# Altium PCB EC20LCC_PCB尺寸图.PcbDoc
Units mil, origin at the board's own origin, x right, y up, seen from the top; angles counter-clockwise.
Board outline 6000 x 4000 mil, 2 copper layers (Top Layer, Bottom Layer); 2 components, 57 nets, 17 pads, 0 vias.
Unrouted connection lines stored in the file: 1.
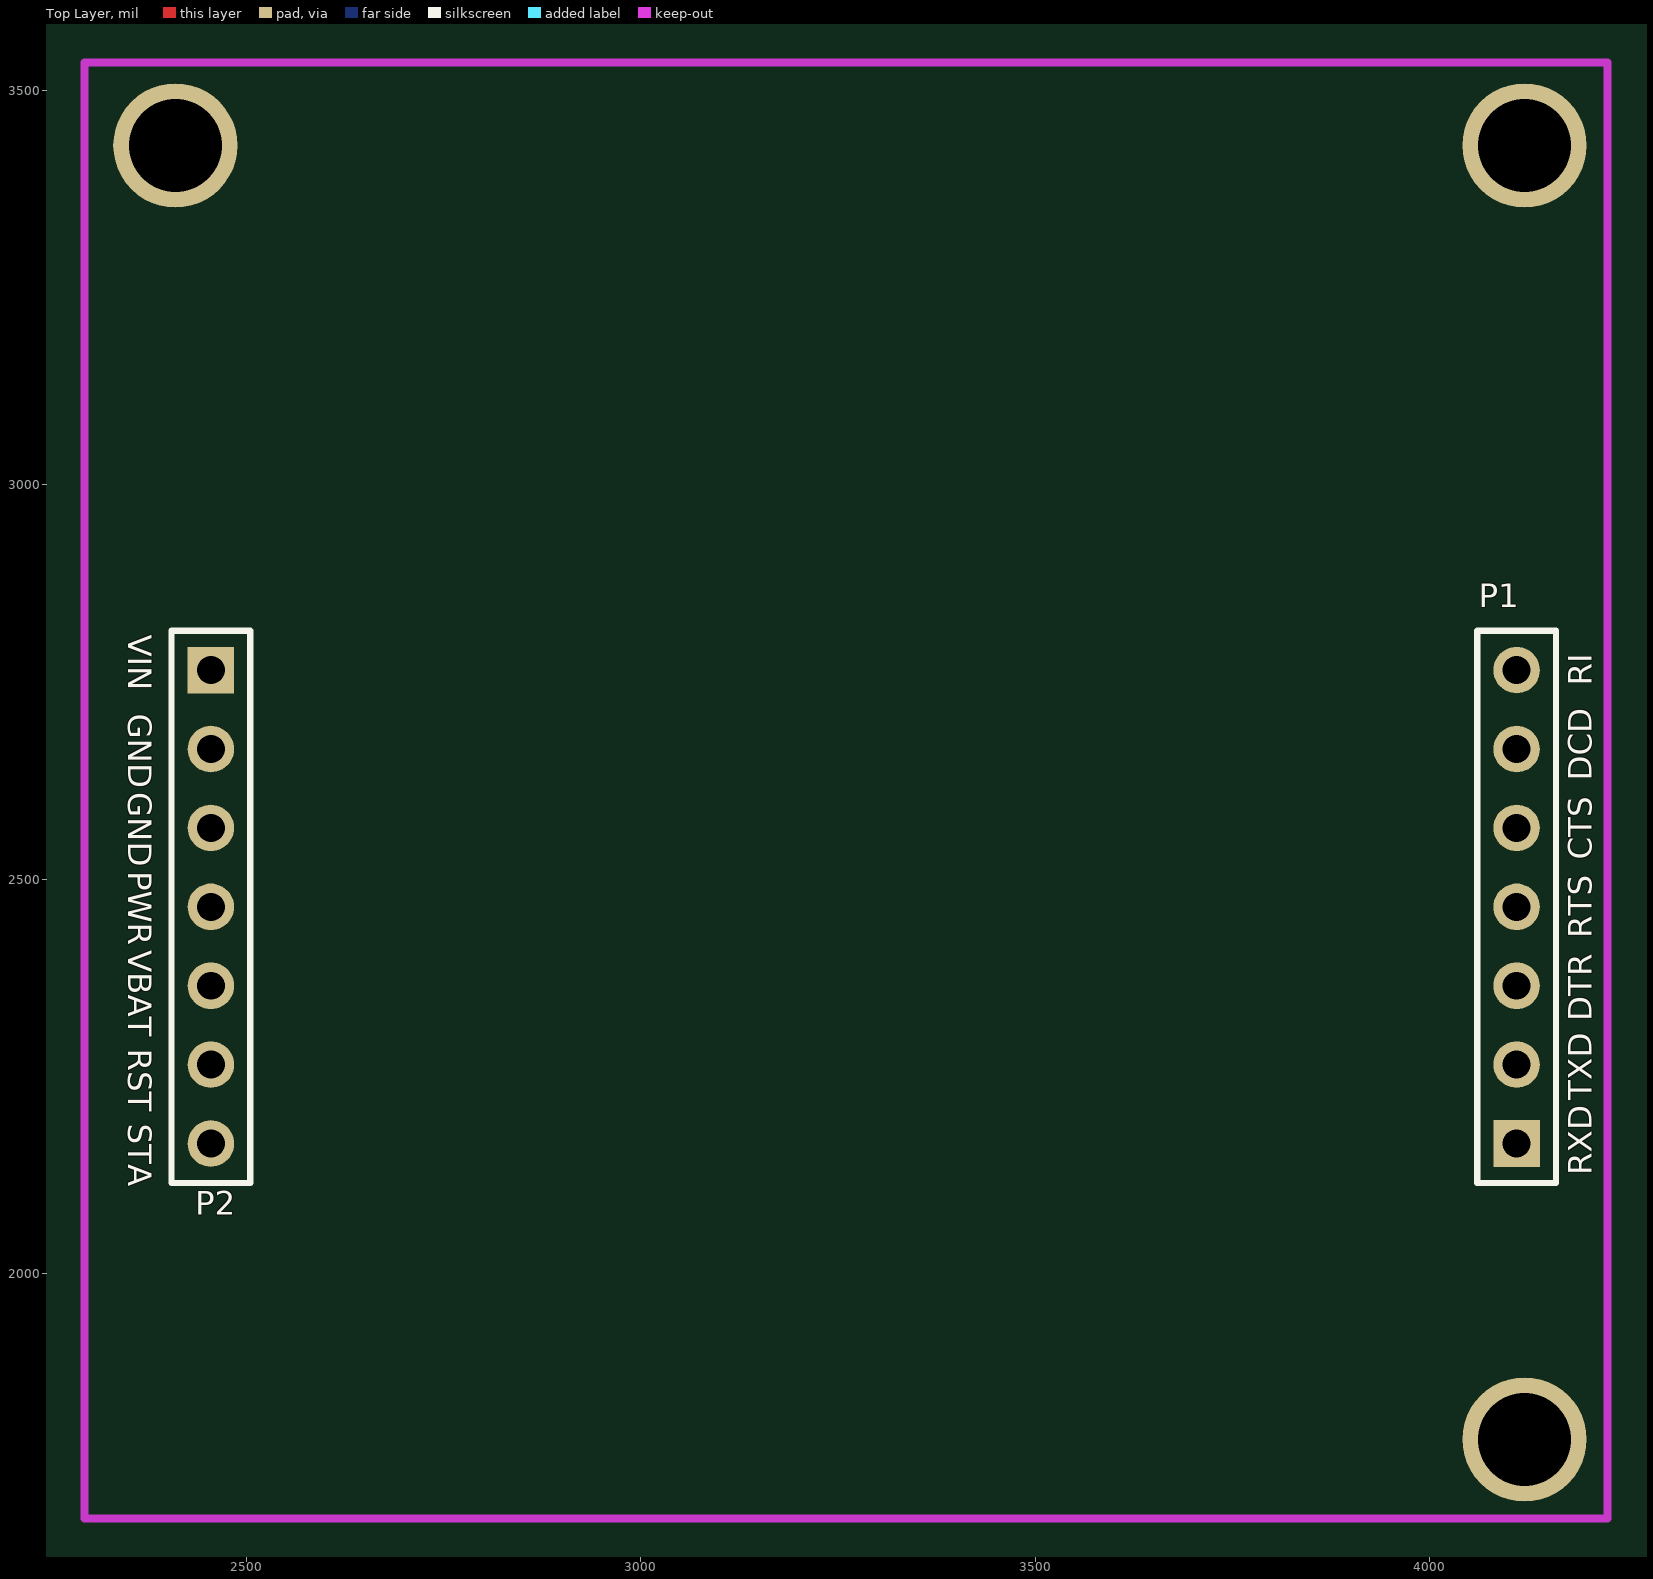
[diagram p0: Top Layer view]
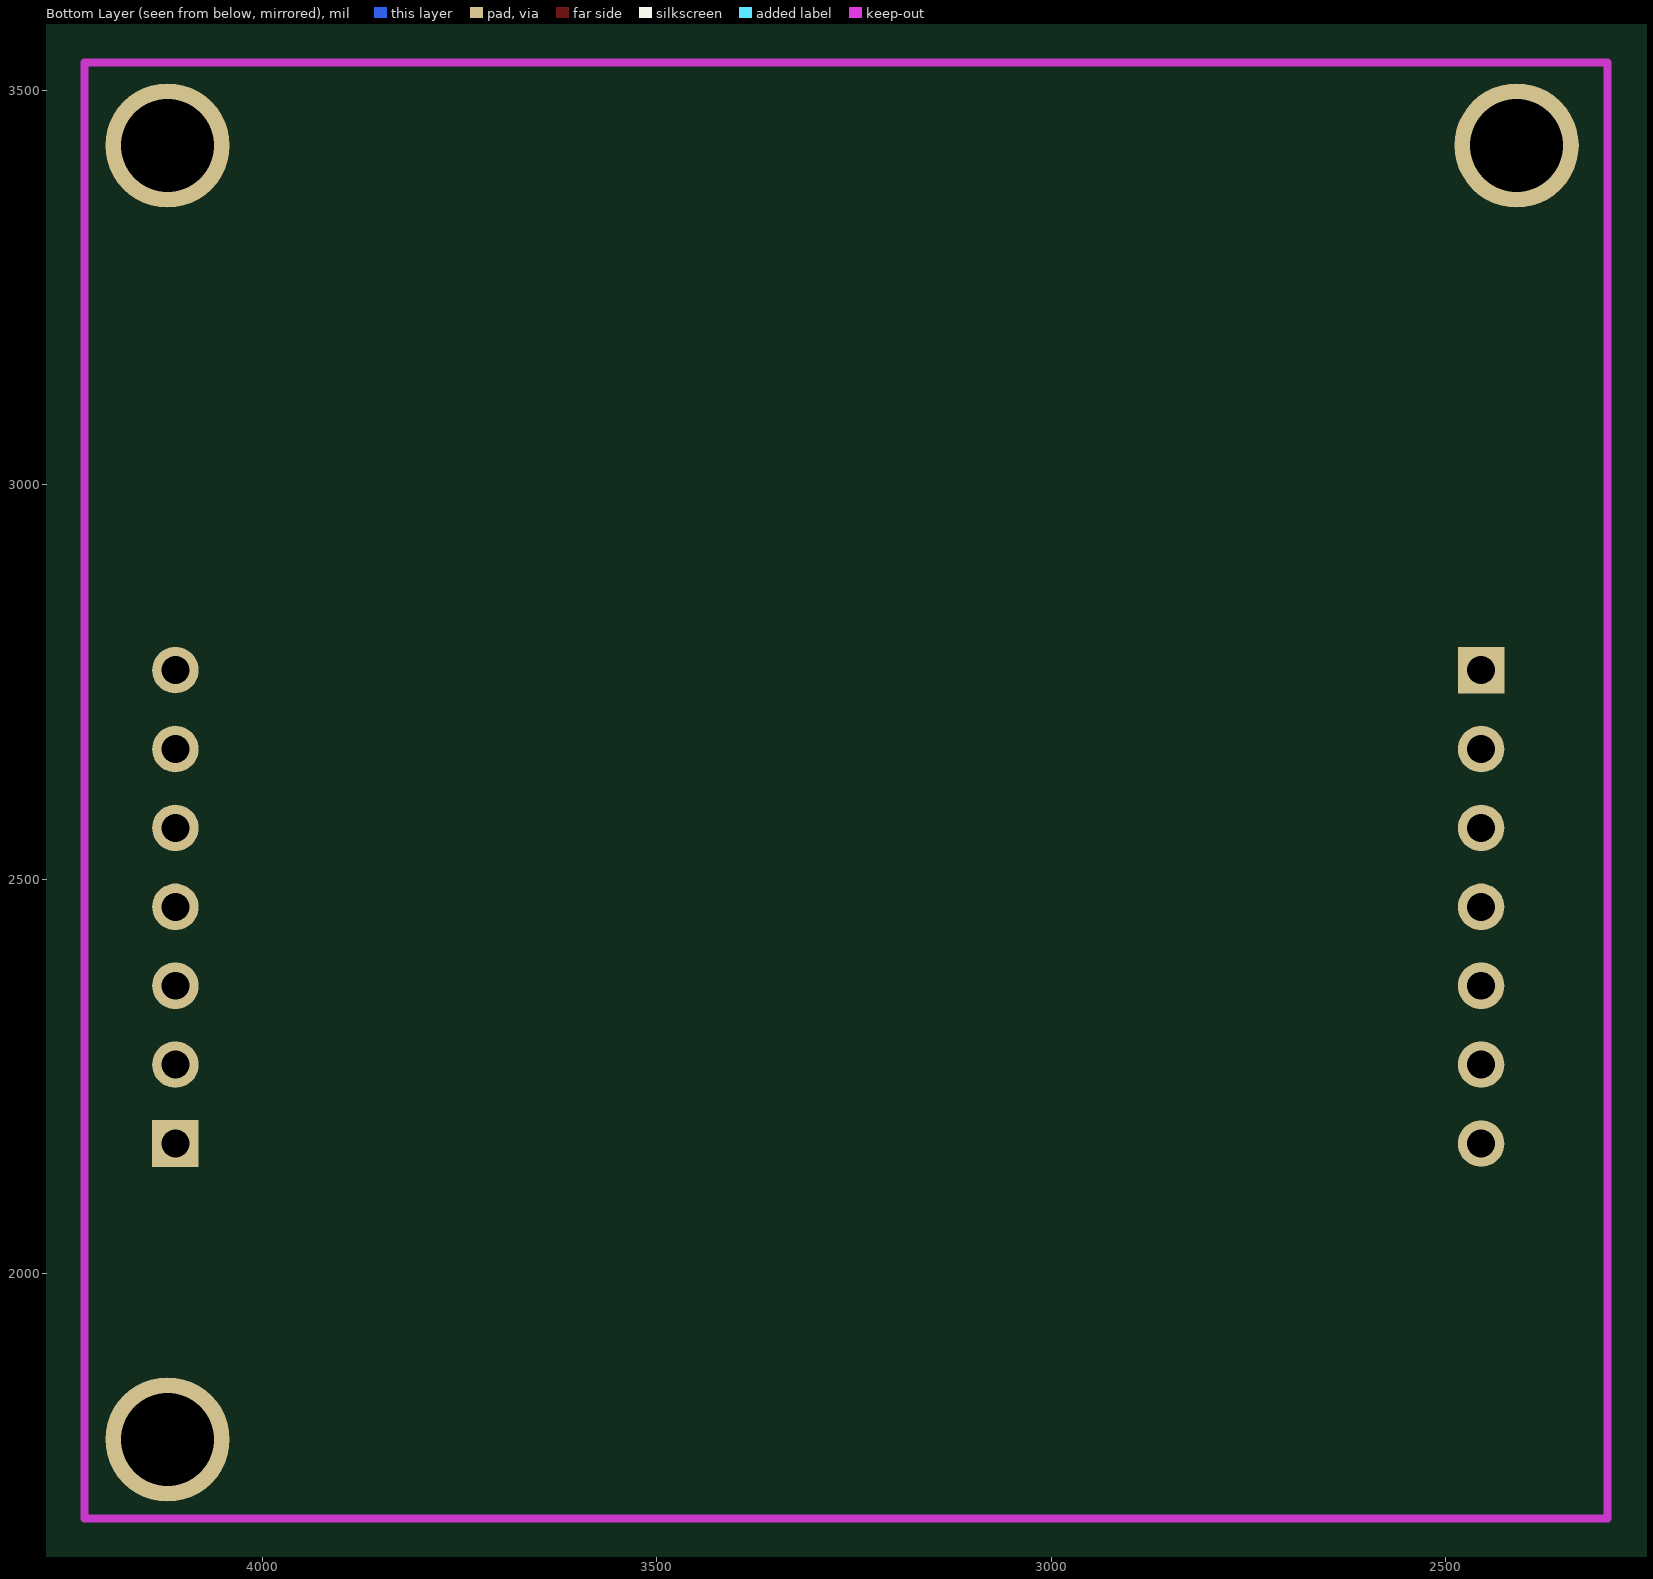
[diagram p1: Bottom Layer view, seen from below]

## Layer stack, top to bottom
Top Layer: signal copper 1.4
Dielectric: dielectric 12.6, FR-4, Dk 4.8
Bottom Layer: signal copper 1.4

## Board outline
1000,1000 7000,1000 7000,5000 1000,5000

## Design rules (kind name [scope] priority, off if disabled: settings)
Clearance [All] p1: gap=5.91
PlaneConnect [All] p1: planeconnectstyle=Direct reliefexpansion=20 reliefentries=4 reliefconductorwidth=10 reliefairgap=10
PolygonConnect [All] p1: connectstyle=Direct reliefconductorwidth=10 reliefentries=4 polygonreliefangle="90 Angle"
RoutingVias [All] p1: holewidth=28 width=50 viastyle="Through Hole" minholewidth=28 minwidth=50 maxholewidth=28 maxwidth=50
SilkToSilkClearance [InNet('No Net') vs InNet('No Net')] p1: silktosilkclearance=10
SilkscreenOverComponentPads [InNet('No Net') vs InNet('No Net')] p1: minsilkscreentomaskgap=10
SolderMaskExpansion [All] p1: expansion=4
Width [All] p1: maxlimit=100 minlimit=10 preferedwidth=10 minimp=50.000000 maximp=50.000000 favimp=50.000000
25 further rules are at their usual default settings.

## Components (designator, comment, footprint, x,y, rotation, side; value= is the part's Value field where it differs from the comment)
P1 "Header 7" HDR1X7 4110,2165 r90 top
P2 "Header 7" HDR1X7 2455,2765 r270 top

## Footprints (in the part's own frame and the unit in brackets; to place one, negate y for a bottom-side part, rotate by r counter-clockwise, add the part's x,y. Pads: shape width x height; smd on the part's side, far side on the other; paste and mask are expansions set on the pad)
HDR1X7 [mm] "Conn"
  rect 1.5x1.5 hole 0.9: 1(0,0)
  round 1.5 hole 0.9: 2(2.54,0) 3(5.08,0) 4(7.62,0) 5(10.16,0) 6(12.7,0) 7(15.24,0)
  silkscreen extent -1.27,-1.27 16.51,1.27

## Part data
P1 P2: "Header, 7-Pin"

## Free pads (board coordinates)
  round 157.48 hole 118.11: 0(4120,3430) 1(2410,3430) 2(4120,1790)

## Nets (pads, with @x,y where several pads share a name; then routed paths per layer and width w, separated by ;. In a path a pad name is that pad's centre, name@x,y a point inside that pad or via, vN(x,y) a via of type N, cw(c..) or ccw(c..) an arc to the next point about the centre after c; other vN are vias at no path point)
CTS: 
CTS_T: P1.5
DBG_RXD: 
DBG_TXD: 
DCD: 
DCD_T: P1.6
DTR: 
DTR_T: P1.3
GND: P2.2 P2.3
NET: 
NetC4_1: 
NetC4_2: 
NetC5_2: 
NetC8_2: 
NetC12_1: 
NetC12_2: 
NetC15_2: 
NetD1_1: 
NetD1_2: 
NetJ1_1: 
NetJ2_1: 
NetJ3_1: 
NetL2_2: 
NetP3_1: 
NetP3_2: 
NetP3_3: 
NetQ1_2: 
NetQ2_2: 
NetQ3_2: 
NetR3_1: 
NetR4_1: 
NetR8_2: 
NetR9_1: 
NetR13_2: 
NetR17_2: 
PWRKEY: P2.4
PWRKEY_EC20: 
RI: 
RI_T: P1.7
RST: P2.6
RST_EC20: 
RTS: 
RTS_T: P1.4
RXD: 
RXD_R: P1.1
SIM_CLK: 
SIM_DATA: 
SIM_RST: 
SIM_VDD: 
STA: P2.7
TXD: 
TXD_T: P1.2
USB_DM: 
USB_DP: 
VBAT_VCC: P2.5
VDD_1V8: 
VIN: P2.1

## Keep-outs
Keep-Out Layer:
  lines w10: 2295,1690 2295,3535 4225,3535 4225,1690 2295,1690

## Silkscreen, mask and mechanical layers (free items; w line width, h text height)
Top Overlay:
  text "VIN" at 2350,2810 h30 r270
  text "RI" at 4205,2745 h30 r90
  text "GND" at 2350,2710 h30 r270
  text "DCD" at 4205,2625 h30 r90
  text "GND" at 2350,2610 h30 r270
  text "CTS" at 4205,2525 h30 r90
  text "PWR" at 2350,2510 h30 r270
  text "RTS" at 4205,2425 h30 r90
  text "VBAT" at 2350,2410 h30 r270
  text "DTR" at 4205,2320 h30 r90
  text "RST" at 2350,2285 h30 r270
  text "TXD" at 4205,2220 h30 r90
  text "STA" at 2350,2190 h30 r270
  text "RXD" at 4205,2125 h30 r90